# EAGLE board air-quality (EAGLE 9.6.2)
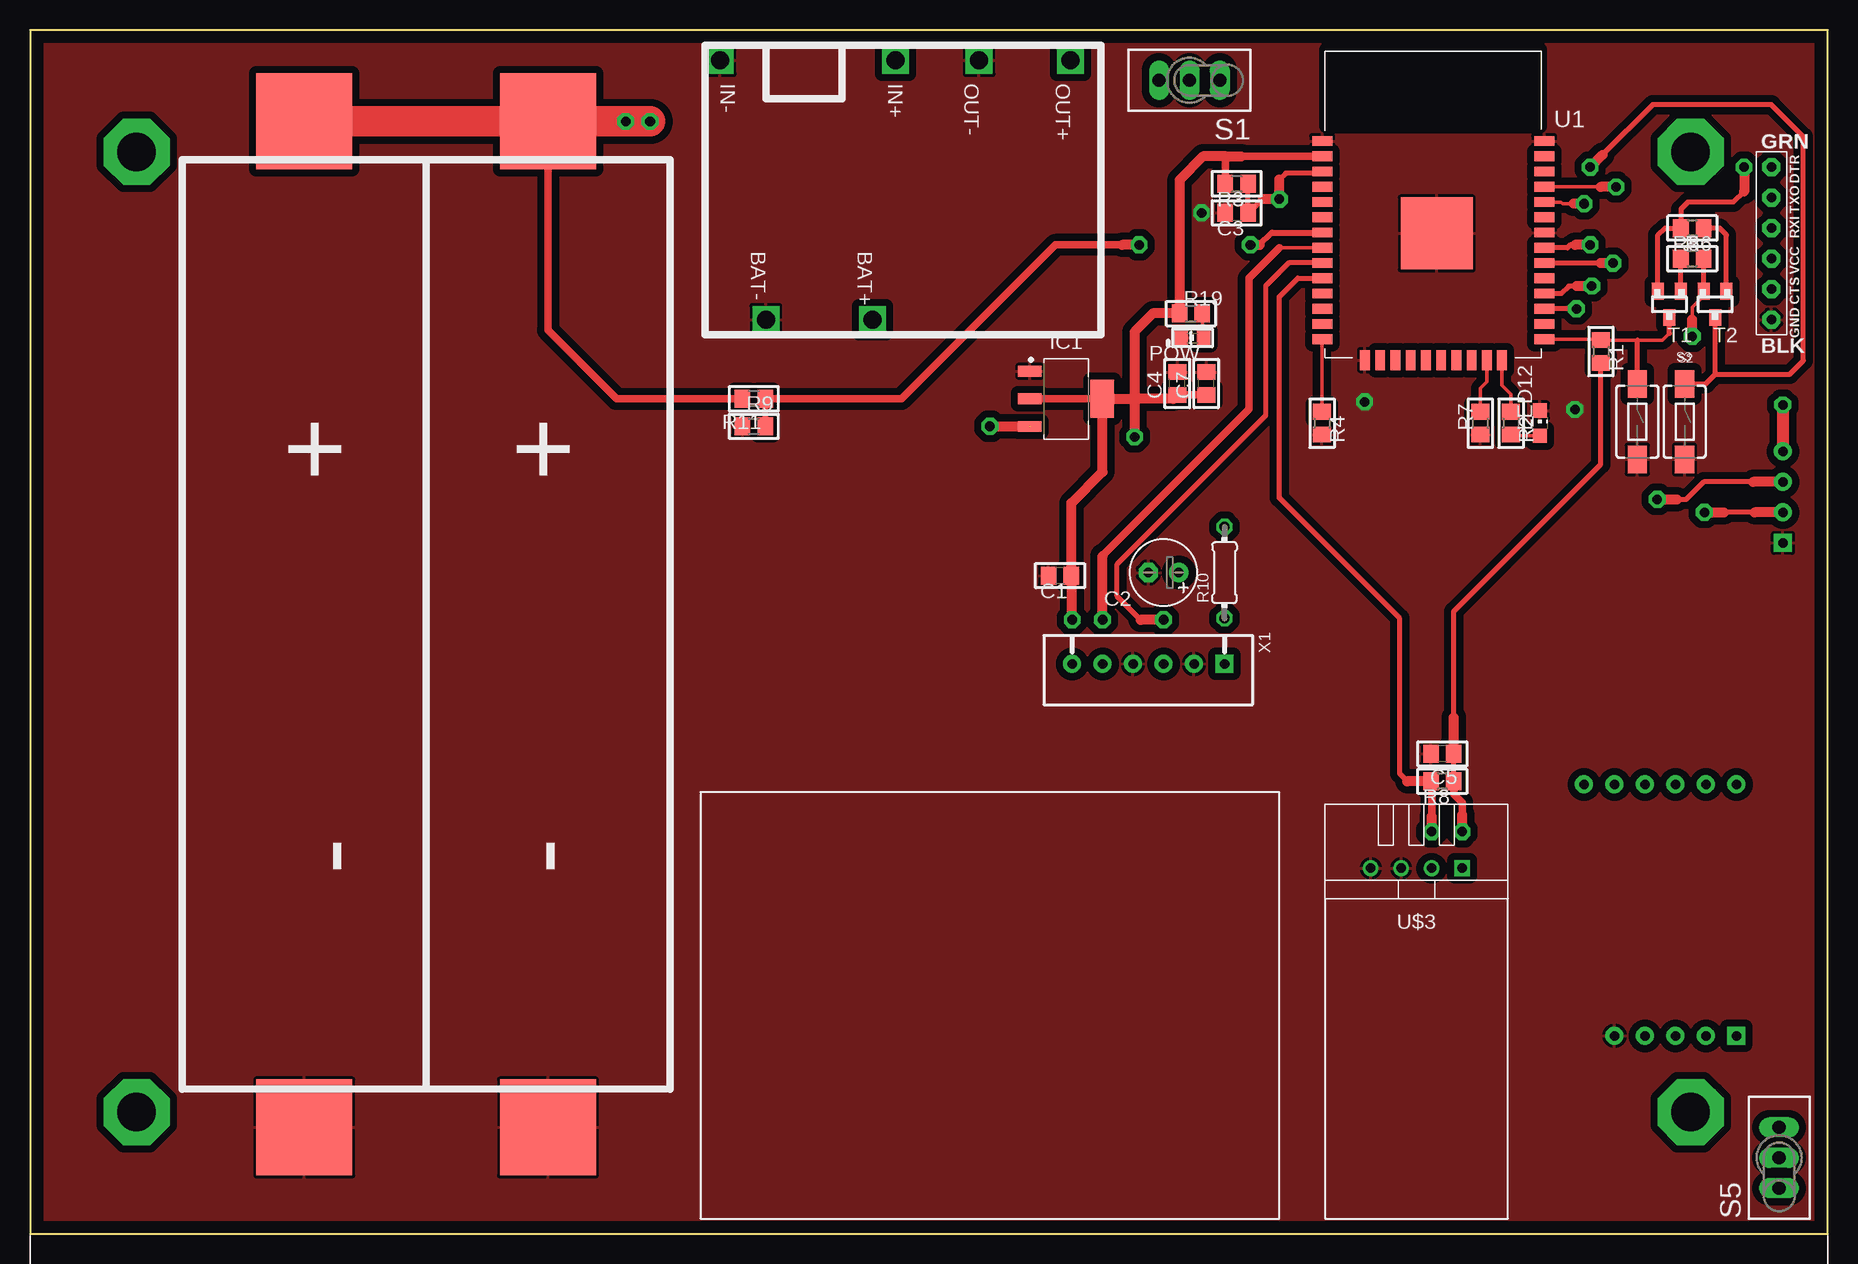
[diagram p0: board, top side]
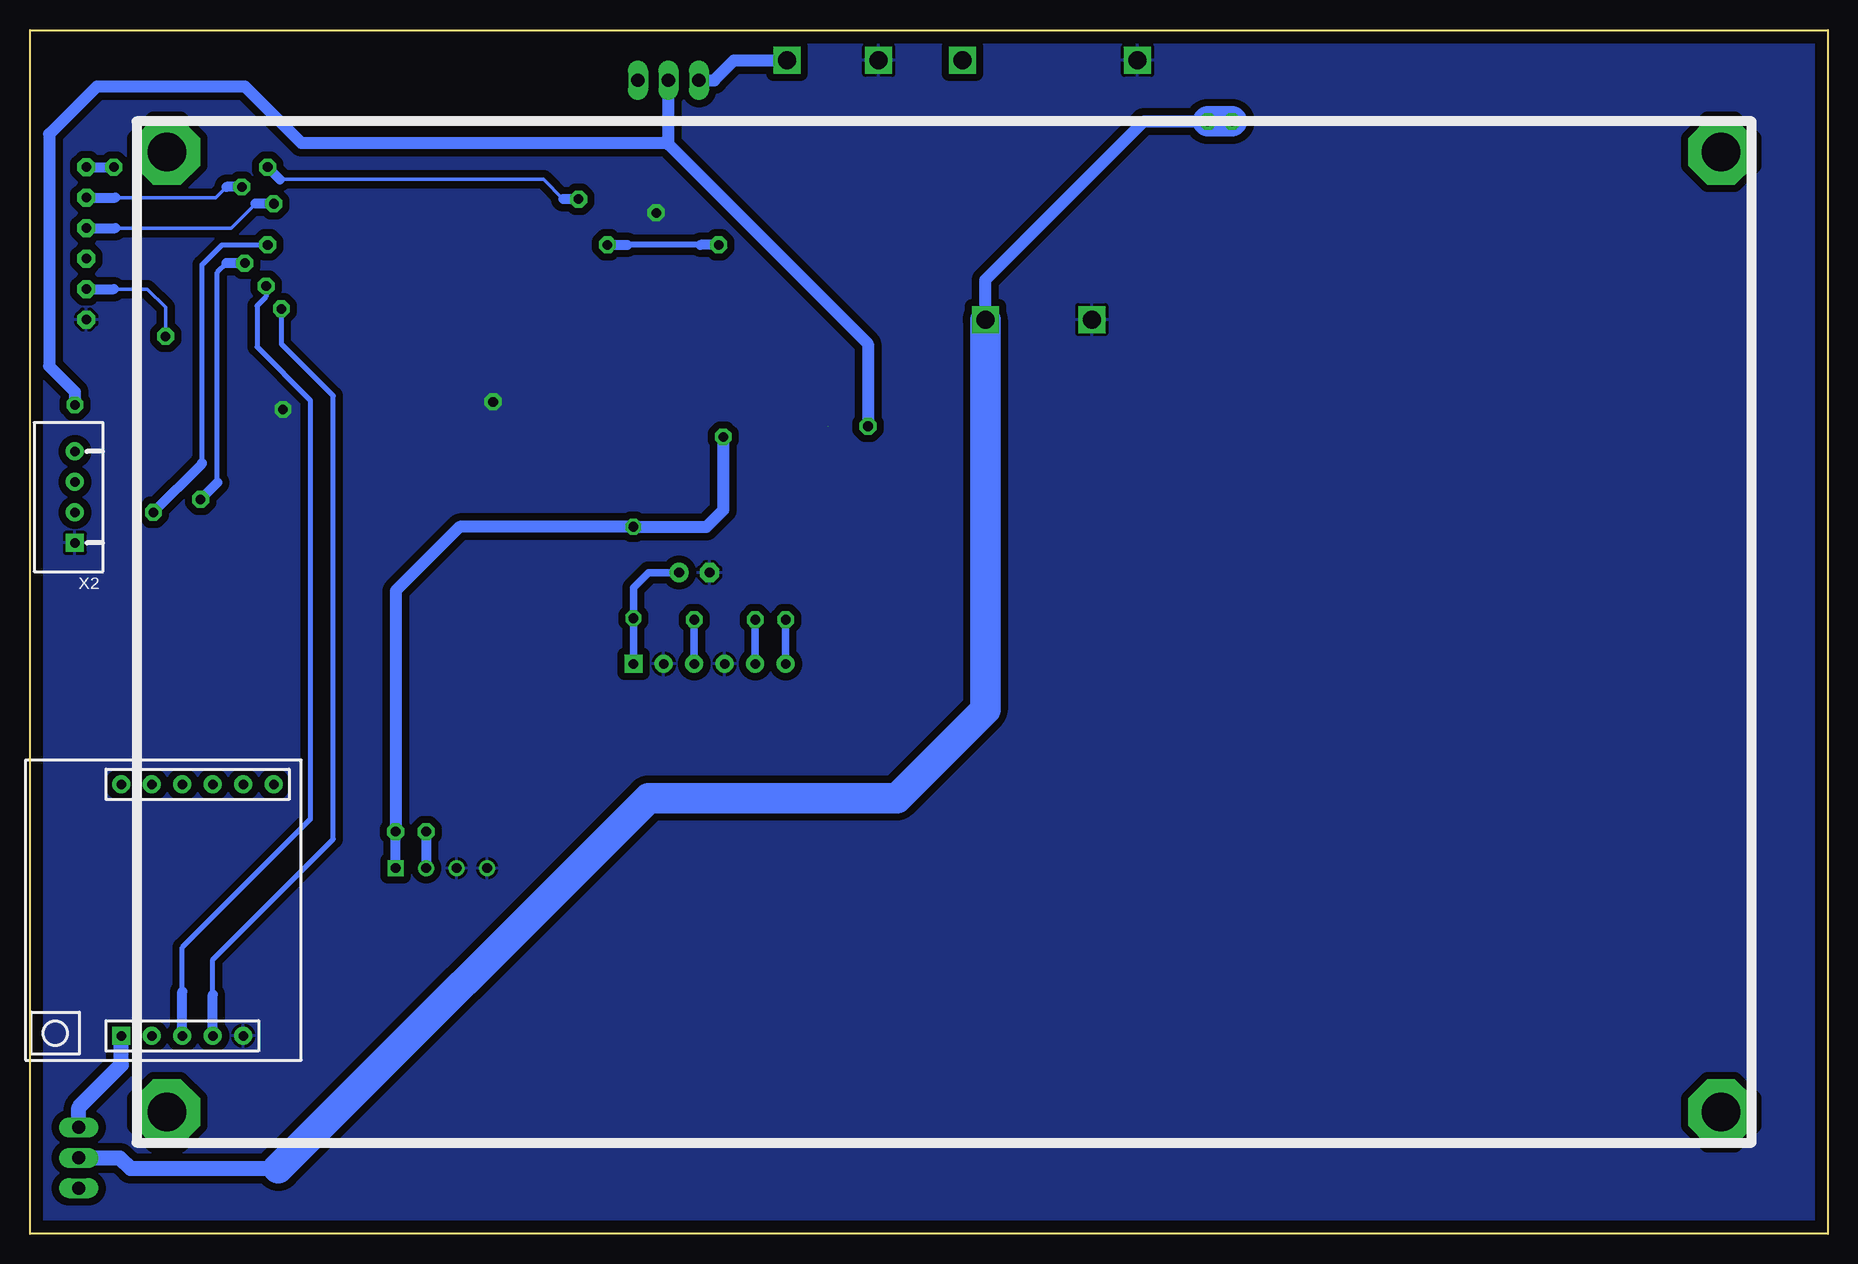
[diagram p1: board, bottom side, seen from below]

Size 149.86 x 100.33 mm. Coordinates in mm from the lower left corner, seen from the top.
Outline: 0,0 149.86,0 149.86,100.33 0,100.33 0,0
Copper layers (1*16): Top 0.035mm / dielectric 1.5mm / Bottom 0.035mm
Design rules "local_pcb": minimum track width 10mil, minimum drill 0.7mm, track to track 0.31mm, track to pad 0.31mm, pad to pad 0.31mm, via to via 0.31mm, smd to smd 2mil, copper to edge 40mil, drill to drill 6mil, minimum pad ring 10mil, minimum via ring 8mil, stop-mask expansion 4mil, vias tented up to drill 0mil, thermal gap 10mil

## Footprints (pad centres in the part's own frame; a part is rotated, then mirrored left to right if it is on the bottom)
C0805 = smd 1.3 x 1.5: 1 -0.95,0; 2 0.95,0
E2,5-6 = drill 0.813 pad 1.6: + -1.27,0 | drill 0.813 pad 1.6 octagon: - 1.27,0
SOT230P700X180-4N = smd 1.965 x 0.889: 1 -3.023,2.3; 2 -3.023,0; 3 -3.023,-2.3 | smd 1.965 x 3.189: 4 3.023,0
6_PIN_SERIAL_TARGET_SIDE_W_SILK-FEMALE = drill 0.8 pad 1.5 octagon: 1 -6.35,0; 2 -3.81,0; 3 -1.27,0; 4 1.27,0; 5 3.81,0; 6 6.35,0
CHIP-LED0805 = smd 1.2 x 1.2: A 0,-1.05; C 0,1.05
CHIP-LED0603 = smd 1.2 x 1.1: A 0,-0.941; C 0,0.941
R0805 = smd 1.3 x 1.5: 1 -0.95,0; 2 0.95,0
0204/7 = drill 0.813 octagon: 1 -3.81,0; 2 3.81,0
TL3XPO = drill 1.1 pad 1.422 long: 1 -2.54,0; 2 0,0; 3 2.54,0
TACTILE-SWITCH-1101NE = smd 2.3 x 1.6: 1 -3.15,0; 2 3.15,0
SOT23-BEC = smd 1 x 1.4: B -0.95,-1.1; C 0,1.1; E 0.95,-1.1
ESP-WROOM-32 = smd 1.676 x 0.813: 1 -9.25,7; 2 -9.25,5.73; 3 -9.25,4.46; 4 -9.25,3.19; 5 -9.25,1.92; 6 -9.25,0.65; 7 -9.25,-0.62; 8 -9.25,-1.89; 9 -9.25,-3.16; 10 -9.25,-4.43; 11 -9.25,-5.7; 12 -9.25,-6.97; 13 -9.25,-8.24; 14 -9.25,-9.51; 25 9.25,-9.51; 26 9.25,-8.24; 27 9.25,-6.97; 28 9.25,-5.7; 29 9.25,-4.43; 30 9.25,-3.16; 31 9.25,-1.89; 32 9.25,-0.62; 33 9.25,0.65; 34 9.25,1.92; 35 9.25,3.19; 36 9.25,4.46; 37 9.25,5.73; 38 9.25,7 | smd 0.813 x 1.676: 15 -5.7,-11.25; 16 -4.43,-11.25; 17 -3.16,-11.25; 18 -1.89,-11.25; 19 -0.62,-11.25; 20 0.65,-11.25; 21 1.92,-11.25; 22 3.19,-11.25; 23 4.46,-11.25; 24 5.73,-11.25 | smd 6 x 6: GND 0.3,-0.7
BMS-LITHIUM = drill 1.5 square: BAT+ -2.54,-10.795; BAT- -11.43,-10.795; IN+ -0.635,10.795; IN- -15.24,10.795; OUT+ 13.97,10.795; OUT- 6.35,10.795
BATTERY-18650-HOLDER-2PACK-SMD = smd 8 x 8: +0 -41.91,10.16; +1 -41.91,-10.16; -0 41.91,10.16; -1 41.91,-10.16
TEMP-HUM-SENSOR-DHT22 = drill 0.8 square: 1 -3.81,0 | drill 0.8: 2 -1.27,0; 3 1.27,0; 4 3.81,0
SIM800LMODULE = drill 0.8 pad 1.5: DTR 10.795,1.27; GND -10.16,-6.35; MIC+ 10.795,-1.27; MIC- 10.795,-3.81; RING 10.795,3.81; RST -10.16,1.27; RX -10.16,-1.27; SPK+ 10.795,-6.35; SPK- 10.795,-8.89; TX -10.16,-3.81 | drill 0.8 pad 1.5 square: VCC -10.16,3.81
JST-XH-06-PACKAGE-ROUND-PAD = drill 0.8 pad 1.5 square: 1 -6.35,0 | drill 0.8 pad 1.5: 2 -3.81,0; 3 -1.27,0; 4 1.27,0; 5 3.81,0; 6 6.35,0
JST-XH-04-PACKAGE-ROUND-PAD = drill 0.8 pad 1.5 square: 1 -3.81,0 | drill 0.8 pad 1.5: 2 -1.27,0; 3 1.27,0; 4 3.81,0

## Placement (x,y rotation side)
C1  [C0805]  85.85,54.86 180 top
C2  [E2,5-6]  94.49,55.12 180 top
C3  [C0805]  100.58,85.09 180 top
C4  [C0805]  95.63,70.87 90 top
C5  [C0805]  117.73,40.01 180 top
C7  [C0805]  98.04,70.87 90 top
IC1  LD1117-XX  [SOT230P700X180-4N]  86.36,69.6 0 top
J2  [6_PIN_SERIAL_TARGET_SIDE_W_SILK-FEMALE]  145.16,82.55 270 top
LED12  [CHIP-LED0805]  125.86,67.56 0 top
POW  [CHIP-LED0603]  96.9,74.68 90 top
R1  [R0805]  130.94,73.53 270 top
R2  [R0805]  123.44,67.56 270 top
R3  [R0805]  100.58,87.5 180 top
R4  [R0805]  107.7,67.56 270 top
R5  [R0805]  138.56,83.82 180 top
R6  [R0805]  138.56,81.28 0 top
R7  [R0805]  120.9,67.56 90 top
R8  [R0805]  117.73,37.72 180 top
R9  [R0805]  60.33,67.31 0 top
R10  [0204/7]  99.57,55.12 90 top
R11  [R0805]  60.33,69.6 180 top
R19  [R0805]  96.77,76.71 0 top
S1  TL32PO  [TL3XPO]  96.65,96.14 180 top
S2  ESP_BOOT  [TACTILE-SWITCH-1101NE]  137.92,67.69 270 top
S3  ESP_EN  [TACTILE-SWITCH-1101NE]  133.99,67.69 270 top
S5  TL32PO  [TL3XPO]  145.8,6.35 90 top
T1  [SOT23-BEC]  136.65,77.47 180 top
T2  [SOT23-BEC]  140.46,77.47 180 top
U1  ESP-WROOM-32ESP32-WROOM  [ESP-WROOM-32]  116.97,84.07 0 top
U$1  BMS-LITHIUM  [BMS-LITHIUM]  72.77,87 0 top
U$2  BATTERY-2PACK  [BATTERY-18650-HOLDER-2PACK-SMD]  33.02,50.8 270 top
U$3  TEMP-HUM-SENSOR-DHT22  [TEMP-HUM-SENSOR-DHT22]  115.57,30.48 180 top
U$4  SIM800LMODULE  [SIM800LMODULE]  138.43,26.67 90 bottom
X1  JST-XH-06-PIN-ROUND-PAD  [JST-XH-06-PACKAGE-ROUND-PAD]  93.22,47.5 180 top
X2  JST-XH-04-PIN-ROUND-PAD  [JST-XH-04-PACKAGE-ROUND-PAD]  146.11,61.4 90 bottom

## Library data of the parts
C1-C5 C7 = common; SPICEPREFIX: C
IC1 LED12 POW T1 T2 U1 U$1 U$2 U$4 X1 X2 = common
J2 = connectors
R1-R11 R19 = common; SPICEPREFIX: R
S1 S5 = switch
S2 S3 = common; PROD_ID: SWCH-00815
U$3 = dht22

## Nets
BAT_SENSE: R9.2 R11.1 U1.7
DHT_D: R8.2 U1.10 U$3.2
DTR: J2.1 R5.2 T1.E
EN: C3.1 R3.1 S2.1 T2.C U1.3
ESP_SCL: U1.36
ESP_SDA: U1.33
GND: C1.2 C2.- C3.2 C4.2 C5.2 C7.2 IC1.1 J2.6 LED12.C POW.C R4.2 R7.1 R9.1 S2.2 S3.2 U1.1 U1.15 U1.32 U1.38 U1.GND U$1.BAT- U$1.IN- U$1.OUT- U$2.-0 U$2.-1 U$3.3 U$3.4 U$4.GND X1.2 X1.4 X2.1
GP2Y_ADC: U1.8 X1.5
GP2Y_LED: U1.9 X1.3
GPIO0/BOOT: R1.1 S3.1 T1.C U1.25
GSM_RX: U1.28 U$4.RX
GSM_TX: U1.27 U$4.TX
LCD_RX: U1.31 X2.2
LCD_TX: U1.30 X2.3
LED0: R2.1 U1.24
N$1: R5.1 T2.B
N$2: R4.1 U1.14
N$3: R7.2 U1.23
N$4: LED12.A R2.2
N$5: R6.1 T1.B
N$6: U$1.IN+
N$7: C2.+ R10.1 X1.1
N$8: S1.3 U$1.OUT+
N$26: POW.A R19.2
RTS: J2.5 R6.2 T2.E
RX: J2.3 U1.34
SD_CS: U1.29
SD_MOSI: U1.37
TX: J2.2 U1.35
VB: R11.2 S5.2 U$1.BAT+ U$2.+0 U$2.+1
VBAT: S5.3 U$4.VCC
VCC: IC1.3 S1.2 X2.4
VDD: C1.1 C4.1 C5.1 C7.1 IC1.2 IC1.4 R1.2 R3.2 R8.1 R10.2 R19.1 U1.2 U$3.1 X1.6

## Tracks (layer width: path | path; a pad name or v marks a point on that pad's centre or on a via)
BAT_SENSE  (via drill 0.8 pad 1.4)
  Top 0.508: R11.1 R9.2 | U1.7 103.53,83.45 102.5,82.42
  Top 0.61: R11.1 72.64,69.6 85.47,82.42 91.06,82.42
  Top 0.813: v101.73,82.42 102.5,82.42 | v92.46,82.42 91.06,82.42
  Bottom 0.508: 93.98,82.42 100.08,82.42
  Bottom 0.813: v101.73,82.42 100.08,82.42 | v92.46,82.42 93.98,82.42
DHT_D  (via drill 0.8 pad 1.4)
  Top 0.406: 114.81,37.72 114.17,38.35 114.17,51.31 104.14,61.34 104.14,78.11 105.68,79.64 U1.10
  Top 0.61: R8.2 116.84,37.66 116.84,34.8
  Top 0.813: R8.2 114.81,37.72 | v116.84,33.53 116.84,34.8
  Bottom 0.813: v116.84,33.53 U$3.2
DTR  (via drill 0.8 pad 1.4)
  Top 0.305: T1.E 135.64,78.64
  Top 0.406: T1.E 135.7,83.25 136.27,83.82 R5.2 137.61,85.41 138.18,85.98 141.99,85.98 142.88,86.87
  Top 0.813: v142.88,88.9 142.88,86.87
  Bottom 0.813: J2.1 v142.88,88.9
EN  (via drill 0.8 pad 1.4)
  Top 0.305: U1.3 107.6,88.41
  Top 0.406: 107.6,88.41 104.67,88.41 104.14,87.88 | S2.1 139.68,70.84 140.46,71.63 | 140.46,71.63 T2.C | 140.46,71.63 146.69,71.63 147.83,72.77 147.83,91.44 145.16,94.11 135.25,94.11 131.06,89.92 | 102.74,86.23 101.6,85.09 C3.1 R3.1
  Top 0.813: 102.74,86.23 v104.14,86.23 104.14,87.88 | v130.05,88.9 131.06,89.92
  Bottom 0.305: 129.03,87.88 107.06,87.88 105.41,86.23
  Bottom 0.813: v130.05,88.9 129.03,87.88 | v104.14,86.23 105.41,86.23
GND  (via drill 0.8 pad 1.4)
  other vias: 97.66,85.09 111.25,69.34 128.78,68.71
  pour Top (isolate 0.61): 0,100.33 0,0 149.86,0 149.86,100.33
  pour Bottom (isolate 0.61): 0,100.33 0,0 149.86,0 149.86,100.33
GP2Y_ADC  (via drill 0.8 pad 1.4)
  Top 0.305: U1.8 104.16,82.18
  Top 0.61: 89.41,56.52 101.6,68.71 101.6,79.63 104.16,82.18
  Top 0.813: v89.41,51.18 89.41,56.52
  Bottom 0.61: v89.41,51.18 X1.5
GP2Y_LED  (via drill 0.8 pad 1.4)
  Top 0.406: 92.58,51.18 90.61,53.15 90.61,55.82 103,68.2 103,78.99 104.92,80.91 U1.9
  Top 0.813: v94.49,51.18 92.58,51.18
  Bottom 0.61: v94.49,51.18 X1.3
GPIO0/BOOT
  Top 0.305: U1.25 130.86,74.56 R1.1 133.99,74.48 136.08,74.48 136.65,75.05
  Top 0.406: 136.65,75.05 T1.C | S3.1 133.99,74.48
GSM_RX  (via drill 0.8 pad 1.4)
  Top 0.406: U1.28 127.65,78.37 128.27,78.99 128.91,78.99
  Top 0.813: v130.18,78.99 128.91,78.99
  Bottom 0.406: v130.18,78.99 130.18,78.11 130.94,77.34 130.94,73.91 126.49,69.47 126.49,34.54 137.16,23.88 137.16,20.19
  Bottom 0.813: U$4.RX 137.16,20.19
GSM_TX  (via drill 0.8 pad 1.4)
  Top 0.406: v128.91,77.09 126.23,77.09 U1.27
  Bottom 0.406: 134.62,19.94 134.62,22.86 124.59,32.89 124.59,69.85 128.91,74.17 v128.91,77.09
  Bottom 0.813: U$4.TX 134.62,19.94
LCD_RX  (via drill 0.8 pad 1.4)
  Top 0.406: 128.78,82.42 128.4,82.42 128.16,82.18 U1.31 | 143.76,60.13 141.22,60.13
  Top 0.813: v139.57,60.13 141.22,60.13 | v130.05,82.42 128.78,82.42 | X2.2 143.76,60.13
  Bottom 0.406: 135.51,64.26 135.51,80.77 133.86,82.42 v130.05,82.42
  Bottom 0.813: v139.57,60.13 135.51,64.2 135.51,64.26
LCD_TX  (via drill 0.8 pad 1.4)
  Top 0.406: 137.29,61.21 138.05,61.21 139.51,62.67 143.64,62.67 | 130.94,80.9 126.23,80.9 U1.30
  Top 0.813: v135.64,61.21 137.29,61.21 | v131.95,80.9 130.94,80.9 | X2.3 143.64,62.67
  Bottom 0.406: 134.24,62.61 134.24,80.14 133.48,80.9
  Bottom 0.813: v135.64,61.21 134.24,62.61 | v131.95,80.9 133.48,80.9
LED0
  Top 0.305: U1.24 122.7,70.72 123.44,69.98 R2.1
N$1
  Top 0.406: T2.B 141.41,83.25 140.84,83.82 R5.1
N$2
  Top 0.305: R4.1 107.7,74.54 U1.14
N$3
  Top 0.305: R7.2 120.9,70.48 121.43,71.01 U1.23
N$4
  Top 0.305: LED12.A 123.54,66.51 R2.2
N$5
  Top 0.305: T1.B
  Top 0.406: T1.B R6.1
N$7
  Bottom 0.61: X1.1 R10.1 99.57,53.85 98.3,55.12 C2.+
N$8
  Bottom 1.016: S1.3 92.84,96.14 91.19,97.79 U$1.OUT+
N$9  (via drill 3.2 pad 5.5)
  other vias: 8.89,90.17
N$11  (via drill 3.2 pad 5.5)
  other vias: 138.43,90.17
N$12  (via drill 3.2 pad 5.5)
  other vias: 138.43,10.16
N$13  (via drill 3.2 pad 5.5)
  other vias: 8.89,10.16
N$26
  Top 0.305: 97.72,76.7 R19.2 97.72,74.79 POW.A
RTS  (via drill 0.8 pad 1.4)
  Top 0.305: 138.56,76.2 138.56,77.22 139.51,78.17 T2.E
  Top 0.406: T2.E R6.2
  Top 0.813: v138.56,74.8 138.56,76.2
  Bottom 0.305: 142.88,78.74 140.08,78.74 138.56,77.22 v138.56,74.8
  Bottom 0.813: J2.5 142.88,78.74
RX  (via drill 0.8 pad 1.4)
  Top 0.305: 128.65,85.85 127.76,85.85 127.61,85.99 U1.34
  Top 0.813: v129.54,85.85 128.65,85.85
  Bottom 0.305: 142.75,83.82 133.1,83.82 131.06,85.85
  Bottom 0.813: J2.3 142.75,83.82 | v129.54,85.85 131.06,85.85
TX  (via drill 0.8 pad 1.4)
  Top 0.305: 130.94,87.25 126.23,87.25 U1.35
  Top 0.813: v132.21,87.25 130.94,87.25
  Bottom 0.305: 142.75,86.36 134.37,86.36 133.48,87.25
  Bottom 0.813: J2.2 142.75,86.36 | v132.21,87.25 133.48,87.25
VB  (via drill 0.8 pad 1.4)
  Top 0.61: U$2.+0 43.18,75.31 48.9,69.6 R11.2
  Top 2.54: U$2.+1 U$2.+0 v51.69,92.71
  Bottom 1.016: U$1.BAT+ 70.23,79.5 57.02,92.71 v49.66,92.71
  Bottom 1.27: S5.2 142.37,6.35 141.48,5.46 129.16,5.46
  Bottom 2.54: U$1.BAT+ 70.23,43.69 77.6,36.32 98.3,36.32 129.16,5.46 | v51.69,92.71 v49.66,92.71
VBAT
  Bottom 1.27: S5.3 145.8,10.54 142.24,14.1 U$4.VCC
VCC  (via drill 0.8 pad 1.4)  (1 unrouted)
  Top 0.813: v80.01,67.31 83.32,67.31
  Top 1.016: v146.11,69.09 X2.4
  Bottom 1.016: v80.01,67.31 80.01,74.17 96.65,90.81 | 96.65,90.81 S1.2 | 96.65,90.81 96.9,91.06 96.9,90.93 127.25,90.93 131.95,95.63 144.27,95.63 148.26,91.64 148.26,72.31 146.11,70.17 v146.11,69.09
VDD  (via drill 0.8 pad 1.4)
  Top 0.305: 97.72,69.6 C7.1
  Top 0.406: 118.68,43.05 118.68,51.88 130.94,64.14 R1.2 | R8.1 C5.1
  Top 0.61: R8.1 118.68,36.64 119.38,35.94 119.38,34.92 | C4.1 C7.1 | IC1.2 IC1.4 | U1.2 100.98,89.8 100.97,89.79 | R3.2 99.63,89.73 99.69,89.79
  Top 0.813: C4.1 95.31,69.6 92.08,69.6 | 92.08,69.6 91.95,69.6 | 91.95,69.6 IC1.4 89.41,69.57 89.41,63.5 86.8,60.89 C1.1 86.87,54.8 v86.87,51.18 | 100.97,89.79 99.69,89.79 97.79,89.79 95.82,87.82 R19.1 93.6,76.71 92.08,75.18 92.08,69.6 | R3.2 99.51,87.38 | 91.95,69.6 92.08,69.47 v92.08,66.42 | C5.1 118.68,43.05 | v119.38,33.53 119.38,34.92
  Bottom 0.61: X1.6 v86.87,51.18
  Bottom 0.813: U$3.1 v119.38,33.53
  Bottom 1.016: v92.08,66.42 92.08,60.33 93.47,58.93 R10.2 114.05,58.93 119.38,53.59 v119.38,33.53